# Altium PCB SmokeDetector.PcbDoc
Units mil, origin at the board's own origin, x right, y up, seen from the top; angles counter-clockwise.
Board outline 3000 x 2600 mil, 4 copper layers (M1 Top, M2 GND, M3 PWR, M4 Bottom), stack 58.662 mil thick; 66 components, 55 nets, 274 pads, 52 vias.
Unrouted connection lines stored in the file: 56.
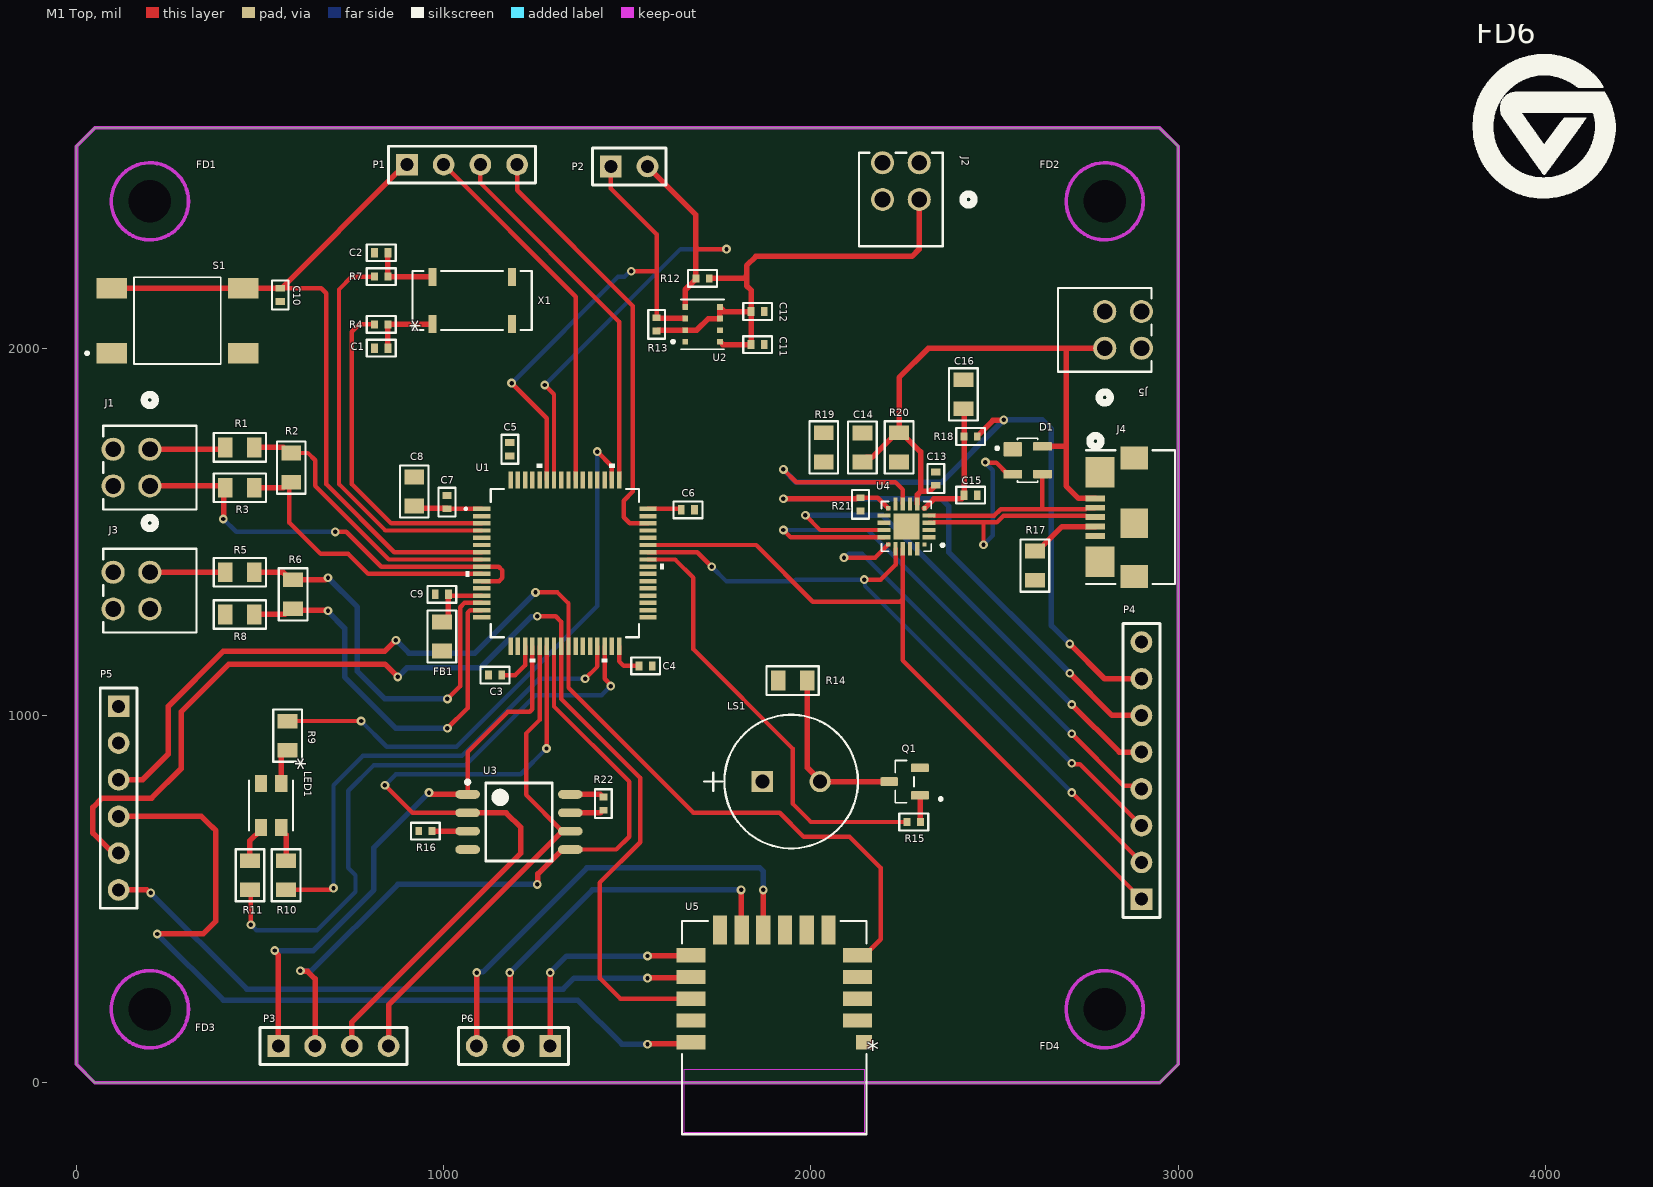
[diagram p0: M1 Top view]
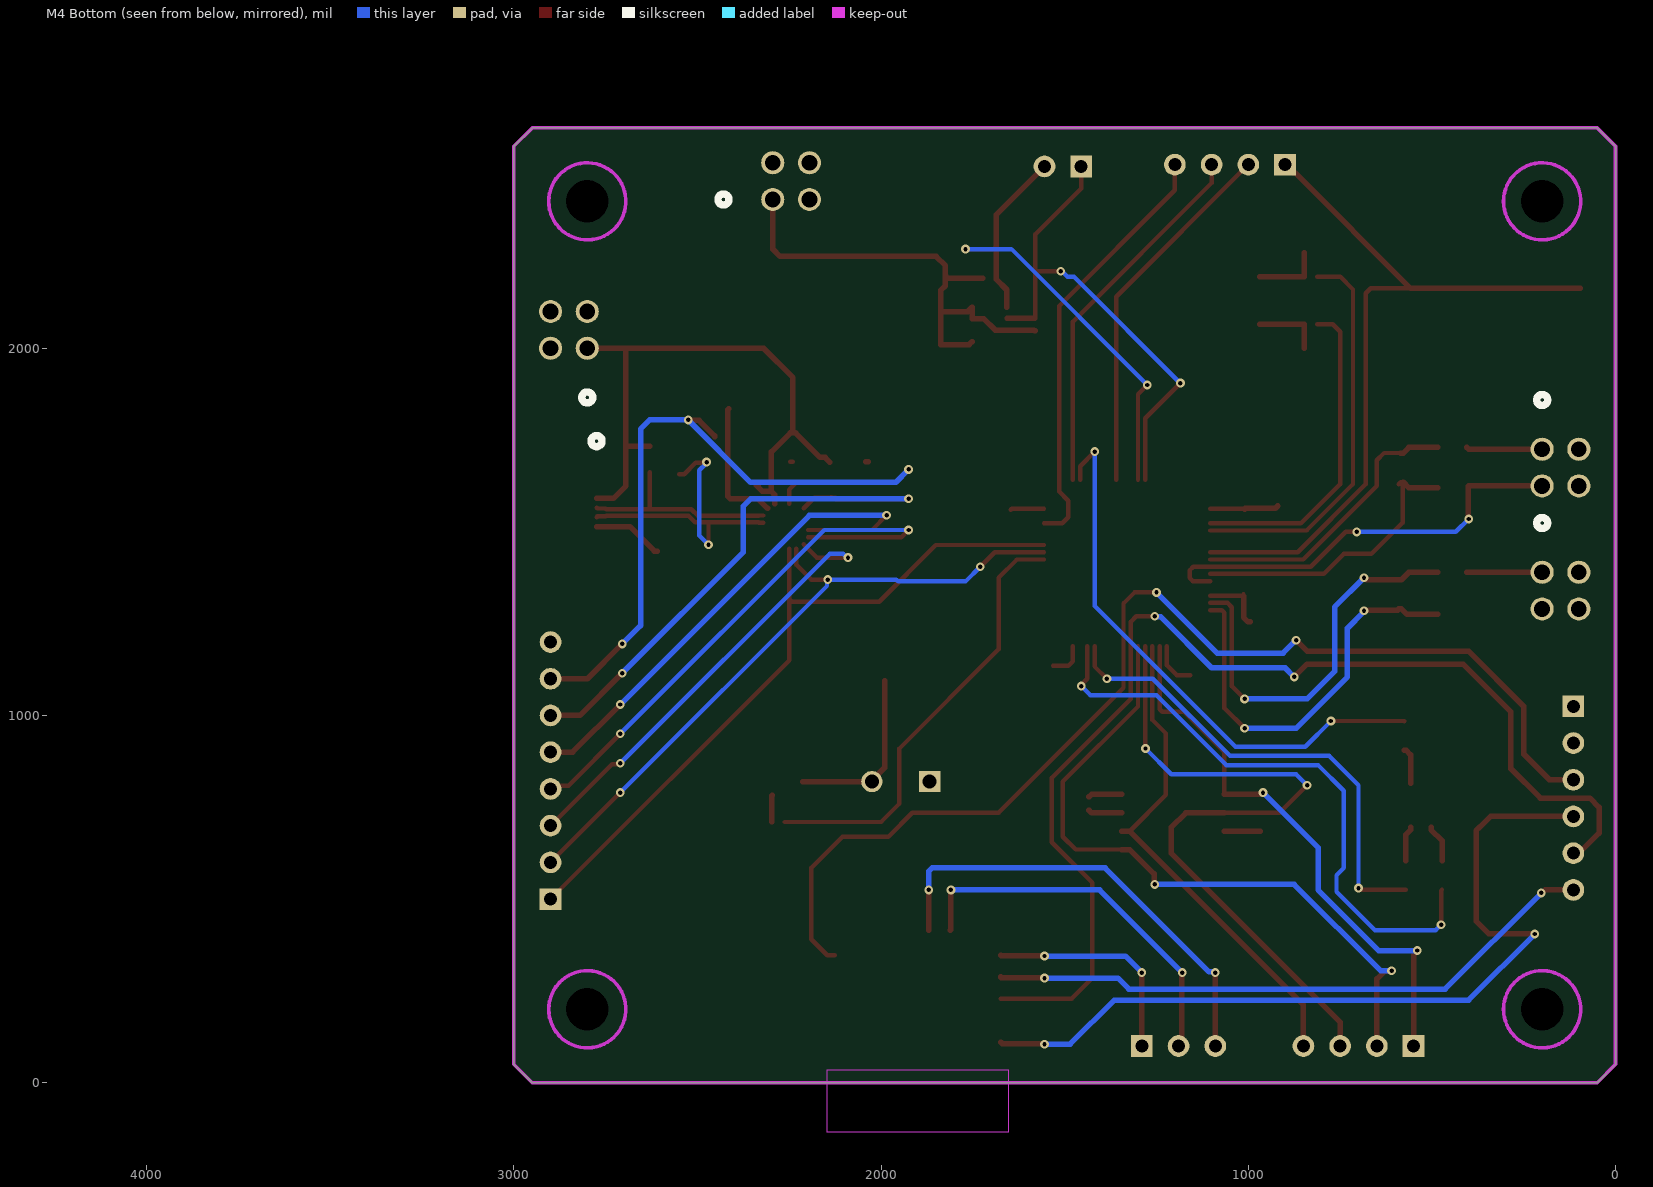
[diagram p1: M4 Bottom view, seen from below]
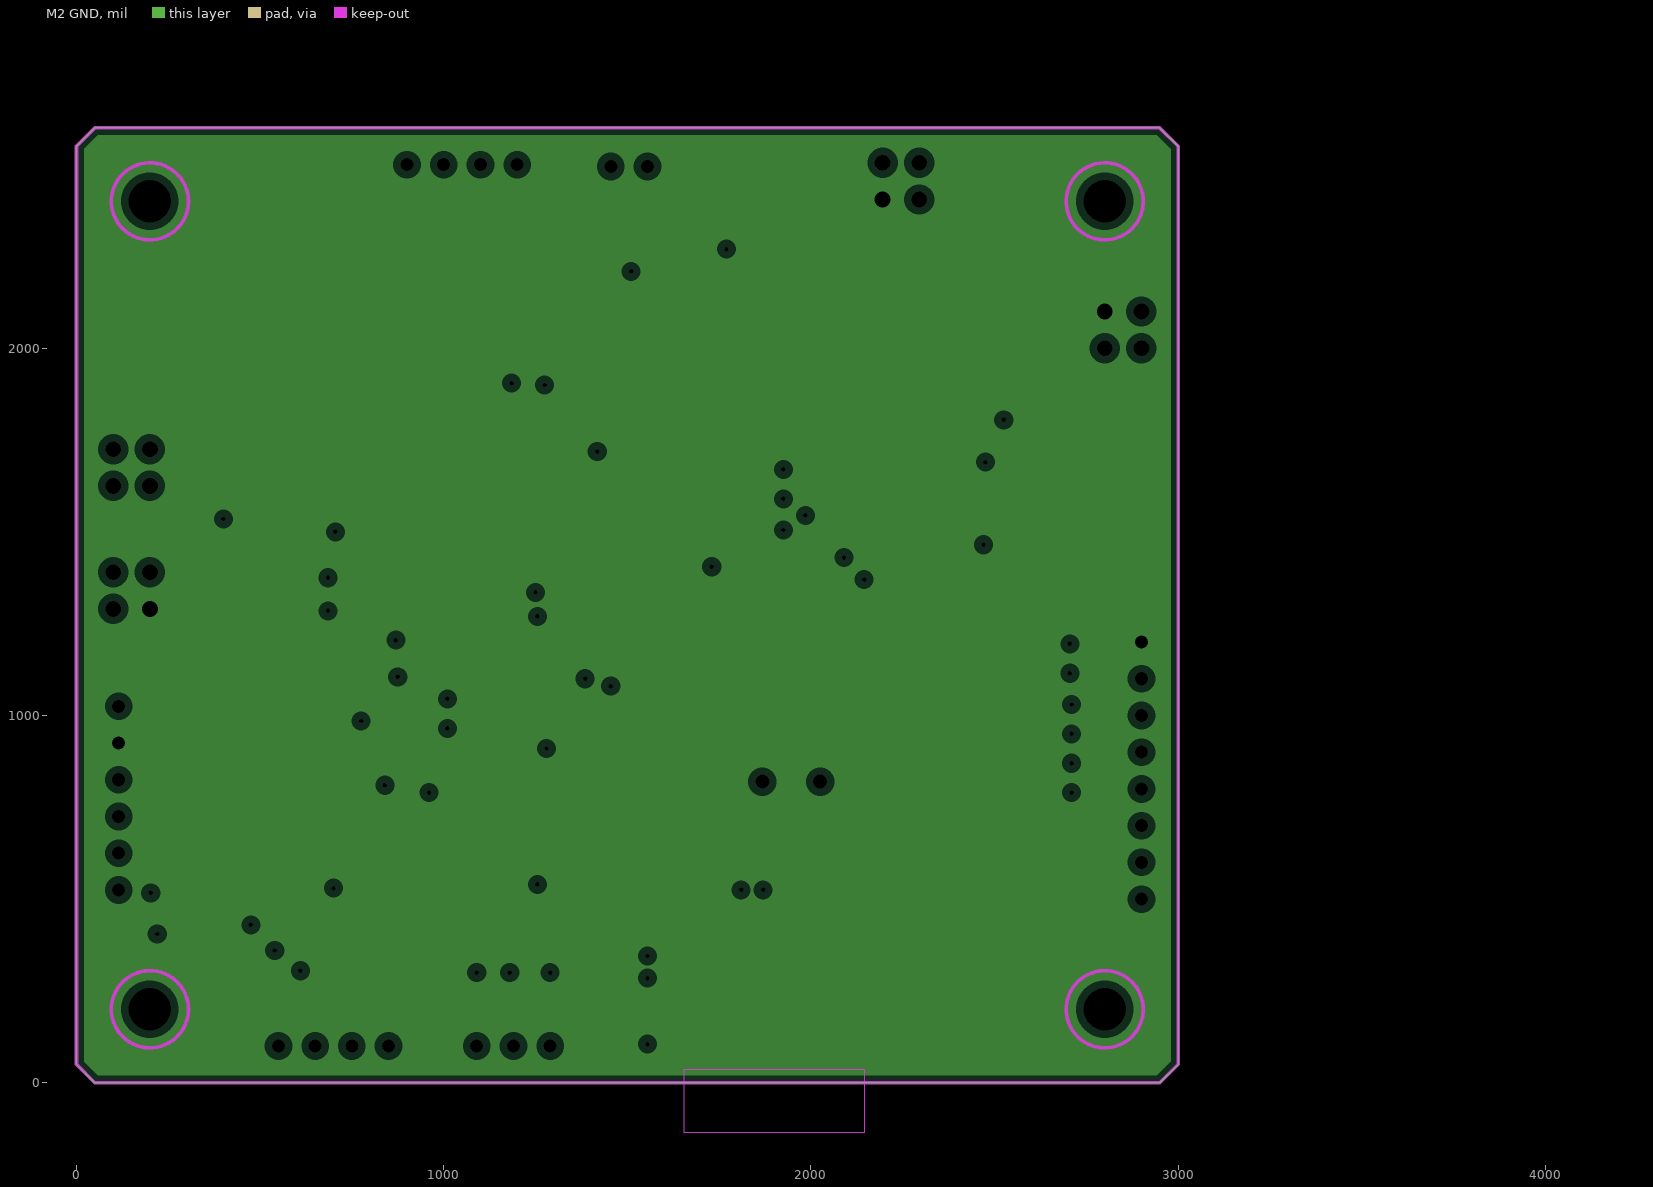
[diagram p2: M2 GND, clearances drawn from the general rule]
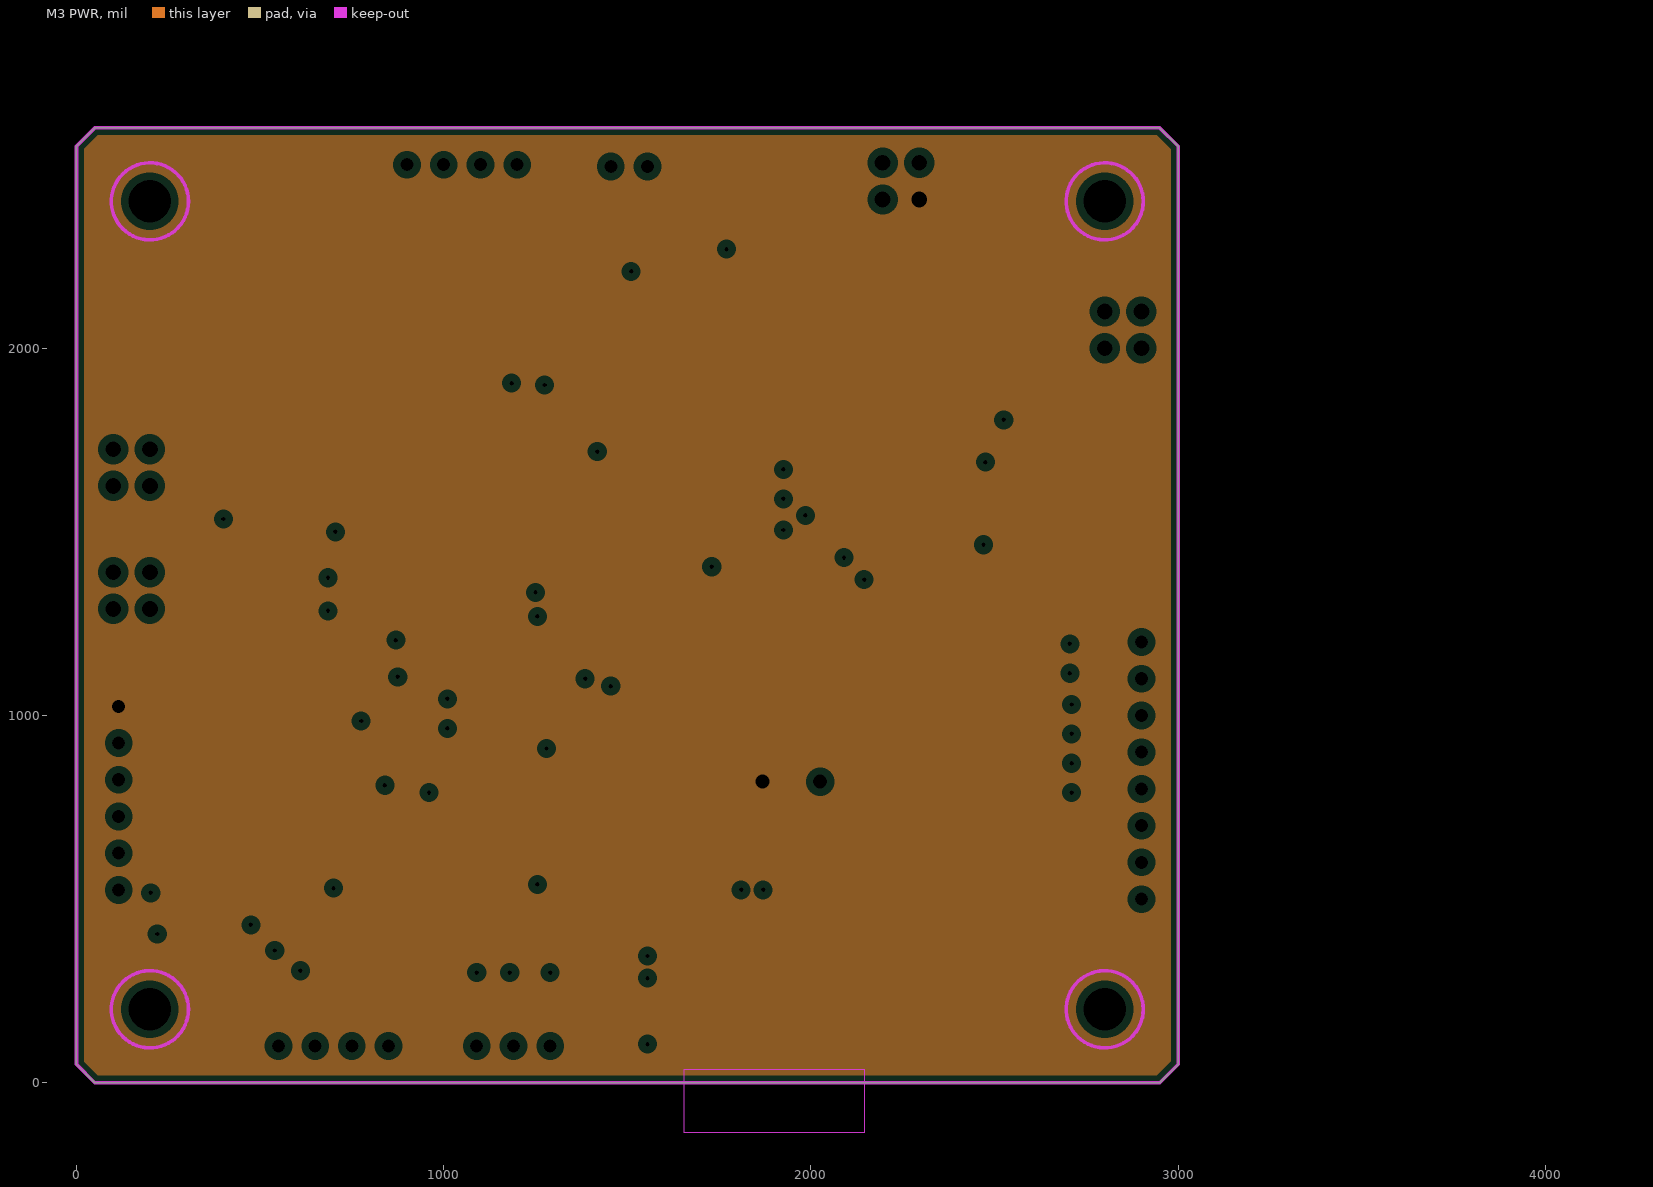
[diagram p3: M3 PWR, clearances drawn from the general rule]
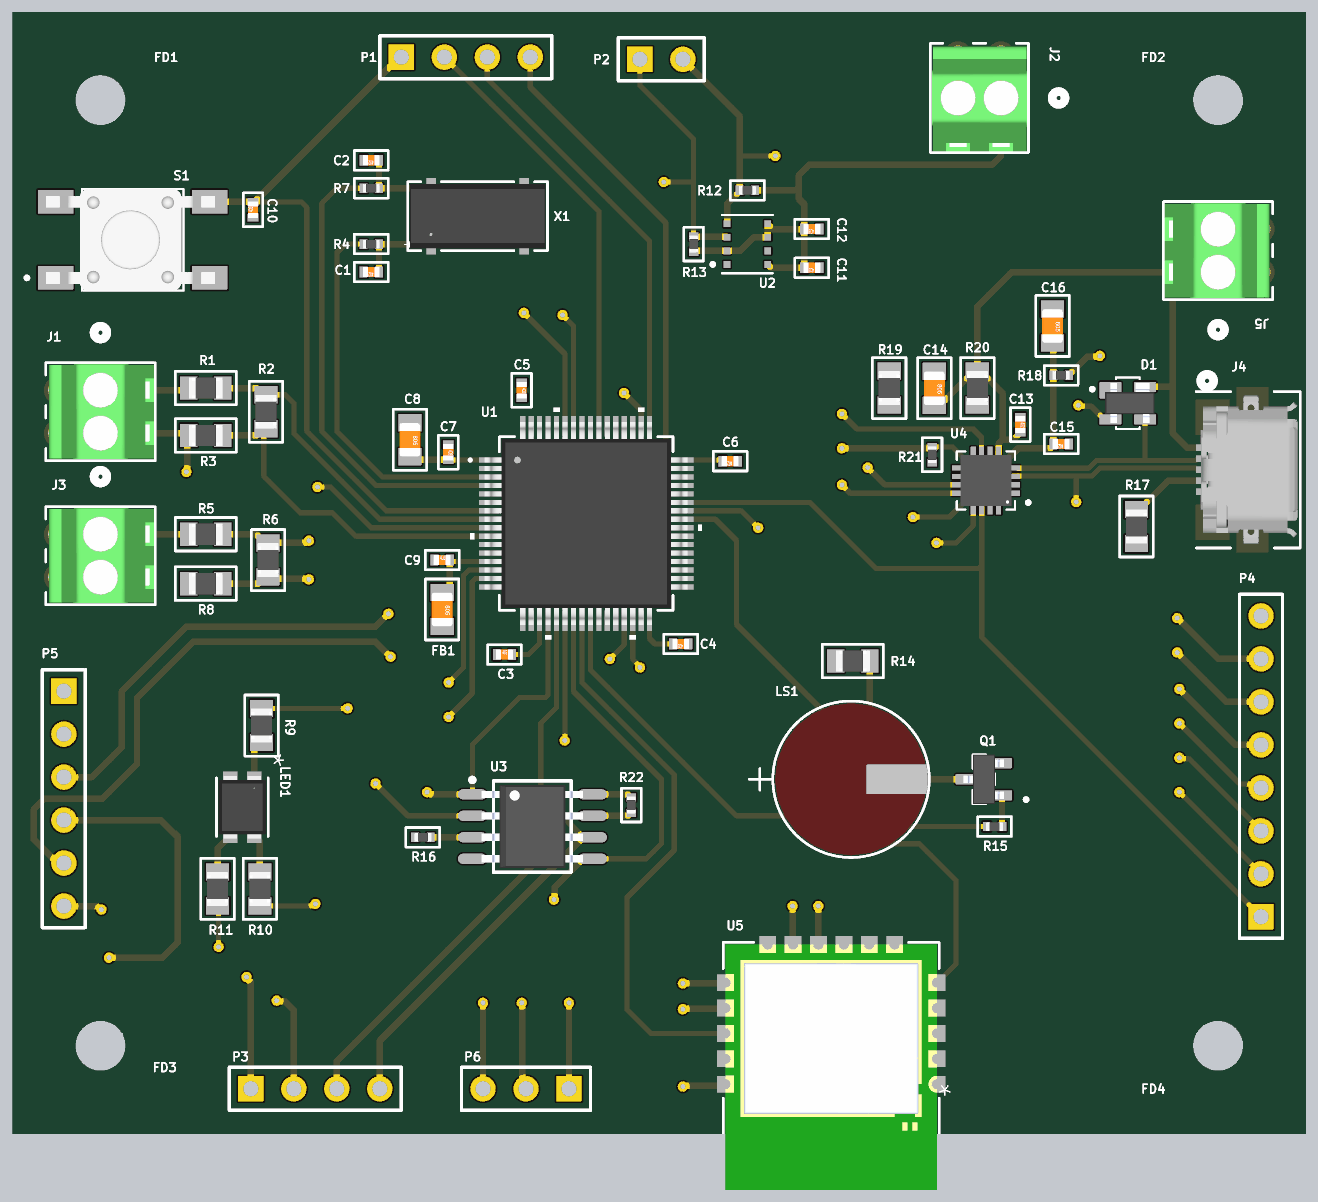
[diagram p4: 3D render of the assembled board from above, using the file's embedded part models]

## Layer stack, top to bottom
Top Solder: solder mask 0.4, Solder Resist, Dk 3.5
M1 Top: signal copper 1.378
Dielectric 1-2: prepreg 4.331, PP-006, Dk 4.29
M2 GND: plane copper 1.378, net GND
Dielectric 2-3: dielectric 44.488, FR-4, Dk 3.96
M3 PWR: plane copper 1.378, net 3V3
Dielectric 3-4: prepreg 4.331, PP-006, Dk 4.29
M4 Bottom: signal copper 1.378
Bottom Solder: solder mask 0.4, Solder Resist, Dk 3.5

## Board outline
0,50 0,2550 50,2600 2950,2600 3000,2550 3000,50 2950,0 50,0

## Design rules (kind name [scope] priority, off if disabled: settings)
BoardOutlineClearance [StringText = FALSE] p1: gap=30 ignorepadtopadclearanceinfootprint=FALSE
Clearance Clearance_Polygon [InPoly = TRUE] p1: gap=12 ignorepadtopadclearanceinfootprint=FALSE
Clearance [All] p2: gap=6 ignorepadtopadclearanceinfootprint=FALSE
DiffPairsRouting [All] p1: maxlimit=10 minlimit=6 mostfreqgap=6 toplayer_minwidth=12 toplayer_maxwidth=15 toplayer_prefwidth=12 bottomlayer_minwidth=12 bottomlayer_maxwidth=15 bottomlayer_prefwidth=12 maxuncoupledlength=500
HoleSize [All] p1: absolutevalues=TRUE maxlimit=5000 minlimit=12 maxpercent=80.000 minpercent=20.000
MinimumSolderMaskSliver [All] p1: minsoldermaskwidth=0
PlaneClearance [All] p1: clearance=20
PlaneConnect [All] p1: pad.planeconnectstyle=Relief pad.reliefexpansion=20 pad.reliefentries=4 pad.reliefconductorwidth=10 pad.reliefairgap=10 via.planeconnectstyle=Direct via.reliefexpansion=20 via.reliefentries=4 via.reliefconductorwidth=10 via.reliefairgap=10
PolygonConnect [All] p1: thpad.connectstyle=Relief thpad.reliefconductorwidth=10 thpad.reliefentries=4 thpad.polygonreliefangle="90 Angle" thpad.airgapwidth=10 smdpad.connectstyle=Relief smdpad.reliefconductorwidth=10 smdpad.reliefentries=4 smdpad.polygonreliefangle="90 Angle" smdpad.airgapwidth=10 via.connectstyle=Direct via.reliefconductorwidth=10 via.reliefentries=4 via.polygonreliefangle="90 Angle" via.airgapwidth=10
RoutingVias [All] p1: holewidth=12 width=26 viastyle="Through Hole" minholewidth=12 minwidth=24 maxholewidth=5000 maxwidth=5000
SilkToSilkClearance [All] p1: silktosilkclearance=0.1
SilkToSolderMaskClearance [IsPad] p1: minsilkscreentomaskgap=0.1 clearancetoexposedcopper=TRUE
SolderMaskExpansion [All] p1: expansion=4 istentingtop=FALSE
Width [All] p1: maxlimit=5000 minlimit=6 preferedwidth=10
23 further rules are at their usual default settings.

## Classes and differential pairs
component class USBtoUART: C13 C14 C15 C16 D1 J4 J5 P4 R17 R18 R19 R20 R21 U4
component class SmokeDetector: C1 C2 C3 C4 C5 C6 C7 C8 C9 C10 FB1 FD1 FD2 FD3 FD4 FD6 J1 J2 J3 LED1 P1 R1 R2 R3 R4 R5 R6 R7 R8 R9 R10 R11 S1 U1 X1
component class GasSensor: C11 C12 LS1 P2 Q1 R12 R13 R14 R15 U2
component class FlashMemory: P3 R16 R22
component class BLE: P5 P6
differential pair D: +D_P -D_N

## Components (designator, comment, footprint, x,y, rotation, side; value= is the part's Value field where it differs from the comment)
C1 "C0402" 0402cap 830,2000 r180 top value=4.3pF
C2 "C0402" 0402cap 830,2260 r180 top value=4.3pF
C3 "C0402" 0402cap 1140,1110 r0 top value=100nF
C4 "C0402" 0402cap 1550,1135 r180 top value=100nF
C5 "C0402" 0402cap 1180,1725 r270 top value=100nF
C6 "C0402" 0402cap 1665,1560 r180 top value=100nF
C7 "C0402" 0402cap 1009.12,1580.88 r270 top value=1uF
C8 "C0805" 0805CAP 920,1610 r270 top value=1uF
C9 "C0402" 0402cap 995,1330 r0 top value=100nF
C10 "C0402" 0402cap 555,2145 r90 top value=100nF
C11 "C0402" 0402cap 1855,2010 r180 top value=100nF
C12 "C0402" 0402cap 1855,2100 r180 top value=100nF
C13 "C0402" 0402cap 2340,1645 r270 top value=0.1uF
C14 "C0805" 0805CAP 2140,1729.6 r270 top value=4.7uF
C15 "C0402" 0402cap 2435,1600 r180 top value=0.1uF
C16 "C0805" 0805CAP 2415,1874.6 r270 top value=4.7uF
D1 "SP0503BAHTG" SOT143 2590,1695 r270 top
FB1 "FB0805" 0805CAP 995,1215 r270 top
FD1 "#4 Mounting Hole" "#4 Mounting Hole-Footprint-1" 200,2400 r0 top
FD2 "#4 Mounting Hole" "#4 Mounting Hole-Footprint-1" 2800,2400 r0 top
FD3 "#4 Mounting Hole" "#4 Mounting Hole-Footprint-1" 200,200 r0 top
FD4 "#4 Mounting Hole" "#4 Mounting Hole-Footprint-1" 2800,200 r0 top
FD6 "GVSU Logo" "GVSU Symbol Only" 4000,2600 r0 top
J1 "1725656" CONN_1725656_PXC 200,1725 r270 top
J2 "1725656" CONN_1725656_PXC 2295,2405 r180 top
J3 "1725656" CONN_1725656_PXC 200,1390 r270 top
J4 "ZX62R-B-5P30" CONN_ZX62R-B-5P30_HIR 2870,1540 r90 top
J5 "1725656" CONN_1725656_PXC 2800,2000 r90 top
LED1 "IN-P32TATRGB" 4-PLCC_3P2X2P8_INL 530,755 r270 top
LS1 "CST-931AP" CST-931AP_CUD 1867.52,820 r0 top
P1 "Header 4" HDR1X4 900,2500 r0 top
P2 "Header 2" HDR1X2 1455,2495 r0 top
P3 "Header 4" HDR1X4 550,100 r0 top
P4 "Header 8" HDR1X8 2900,500 r90 top
P5 "Header 6" HDR1X6 115,1025 r270 top
P6 "Header 3" HDR1X3 1290,100 r180 top
Q1 "2N7002" SOT95P240X111-3N 2255,820 r180 top
R1 "R0805" 0805RES 445,1730 r180 top value=1.0k
R2 "R0805" 0805RES 585,1675 r90 top value=1.0k
R3 "R0805" 0805RES 445,1620 r0 top value=1
R4 "R0402" 0402RES 830,2065 r0 top value=0
R5 "R0805" 0805RES 445,1390 r180 top value=1.0k
R6 "R0805" 0805RES 590,1330 r90 top value=1.0k
R7 "R0402" 0402RES 830,2195 r0 top value=0
R8 "R0805" 0805RES 445,1275 r0 top value=1
R9 "R0805" 0805RES 575,945 r270 top value=150
R10 "R0805" 0805RES 570.86,565 r270 top value=100
R11 "R0805" 0805RES 472.6,565 r270 top value=100
R12 "R0402" 0402RES 1705,2190 r0 top value=4.7k
R13 "R0402" 0402RES 1580,2065 r270 top value=4.7k
R14 "R0805" 0805RES 1950.4,1095 r180 top value=1.0k
R15 "R0402" 0402RES 2280,710 r180 top value=1.0k
R16 "R0402" 0402RES 950,685 r180 top value=10k
R17 "R0805" 0805RES 2609.97,1408.08 r270 top value=0
R18 "R0402" 0402RES 2435,1759.6 r180 top value=1k
R19 "R0805" 0805RES 2035,1730 r90 top value=47.5k
R20 "R0805" 0805RES 2240,1730 r270 top value=22.1k
R21 "R0402" 0402RES 2135,1575 r90 top value=10k
R22 "R0402" 0402RES 1435,760 r90 top value=10k
S1 "TL3301NF160QG" SW_TL3301NF160QG 275,2075 r0 top
U1 "STM32L476RGT6" LQFP64-10x10mm_STM 1330,1415 r0 top
U2 "BME688" IC_BME688 1705,2065 r180 top
U3 "W25X40CLSNIG" SOIC127P790X195-8N 1205,710 r0 top
U4 "CP2102N-A02-GQFN20R" SILABS_CP2102N-A02-GQFN20R 2260,1515 r180 top
U5 "DA14531MOD-00F01002" DA14531MOD_REN 1900,150 r180 top
X1 "ABS25-32.768KHZ-6-T" X_ABS25_ABR 1077.55,2130 r90 top

## Footprints (in the part's own frame and the unit in brackets; to place one, negate y for a bottom-side part, rotate by r counter-clockwise, add the part's x,y. Pads: shape width x height; smd on the part's side, far side on the other; paste and mask are expansions set on the pad)
4-PLCC_3P2X2P8_INL [mil]
  rect 46x33 smd paste+0 mask+0: 1(-60,27.85) 2(-60,-27.85) 3(60,-27.85) 4(60,27.85)
  silkscreen extent -68,-60 68,60, body extent -73,-55 73,55, height 75
0402cap [mm] "Chip Capacitor; Body 1.0 x 0.5 mm (LxW typ)"
  rect 0.47x0.64 smd: 1(-0.458,0) 2(0.458,0)
  silkscreen extent -1,-0.58 1,0.58, body extent -1,-0.58 1,0.58, height 0.2
0402RES [mm] "Chip Resistor; Body 1.0 x 0.5 mm (LxW typ)"
  rect 0.47x0.549 smd: 1(-0.458,0) 2(0.458,0)
  silkscreen extent -1,-0.58 1,0.58, body extent -1,-0.58 1,0.58, height 0.27
0805CAP [mil] "Chip Capacitor; Body 2.0 x 1.2 mm (LxW typ)"
  rect 40x54 smd: 1(-39.6,0) 2(39.6,0)
  silkscreen extent -71,-39 71,39, body extent -71,-39 71,39, height 31
0805RES [mil] "Chip Resistor Body 2.0 x 1.2 mm (LxW typ)"
  rect 40x54 smd: 1(-39.6,0) 2(39.6,0)
  silkscreen extent -71,-39 71,39, body extent -71,-39 71,39, height 19
"#4 Mounting Hole-Footprint-1" [mil]
  round 0 hole 116 unplated: 0(0,0)
  Keep-Out Layer circle w10: c0,0 r105
CONN_1725656_PXC [mil]
  round 63 / inner round 60 / far side round 63 hole 43 paste-99999 mask-31.5: 1(0,0) 2(100,0) 3(0,-100) 4(100,-100)
  silkscreen extent -149,-127 164,127, body extent -60,-120 160,124, height 335
CONN_ZX62R-B-5P30_HIR [mil]
  rect 16x53 smd paste+0 mask+0: 1(51.18,95.33) 2(25.59,95.33) 3(0,95.33) 4(-25.59,95.33) 5(-51.18,95.33)
  rect 63x75 smd paste-37.5 mask-37.5: 6(-161.42,-9.98) 7(161.42,-9.98)
  rect 47x75 smd paste-37.5 mask-37.5: 8(-33.46,-9.98) 9(0,-10)
  rect 83x79 smd paste-41.5 mask-41.5: 10(-122.05,82.54) 11(122.05,82.54)
  silkscreen extent -182,-121 222,121, body extent -173,-115 173,111, height 107
CST-931AP_CUD [mil]
  rect 58x58 / inner round 60 / far side rect 58x58 hole 38 paste-99999 mask+0: 1(0,0)
  round 58 / inner round 60 / far side round 58 hole 38 paste-99999 mask+0: 2(157.48,0)
  silkscreen extent -158,-182 261,182, body extent -98,-177 257,177, height 178
DA14531MOD_REN [mil]
  rect 43x39 smd paste+0 mask+0: J1(-244.4,39.5)
  rect 79x39 smd paste+0 mask+0: J2(-226.4,-19.6) J3(-226.4,-78.7) J4(-226.4,-137.8) J5(-226.4,-196.9) J12(226.4,-196.9) J13(226.4,-137.8) J14(226.4,-78.7) J15(226.4,-19.6) J16(226.4,39.5)
  rect 39x79 smd paste+0 mask+0: J6(-147.75,-265.75) J7(-88.65,-265.75) J8(-29.55,-265.75) J9(29.55,-265.75) J10(88.65,-265.75) J11(147.75,-265.75)
  Keep-Out Layer region: -246,285.5 -246,114.5 246,114.5 246,285.5
  silkscreen extent -251,-291 251,291, body extent -246,-285 246,285, height 120
"GVSU Symbol Only" [mil]
  silkscreen extent -198,-190 191,200
HDR1X2 [mm] "Connector; Header; 2 Position"
  rect 1.5x1.5 hole 0.9: 1(0,0)
  round 1.5 hole 0.9: 2(2.54,0)
  silkscreen extent -1.27,-1.27 3.81,1.27
HDR1X3 [mm] "Connector; Header; 3 Position"
  rect 1.5x1.5 hole 0.9: 1(0,0)
  round 1.5 hole 0.9: 2(2.54,0) 3(5.08,0)
  silkscreen extent -1.27,-1.27 6.35,1.27
HDR1X4 [mm] "Connector; Header; 4 Position"
  rect 1.5x1.5 hole 0.9: 1(0,0)
  round 1.5 hole 0.9: 2(2.54,0) 3(5.08,0) 4(7.62,0)
  silkscreen extent -1.27,-1.27 8.89,1.27
HDR1X6 [mm] "Connector; Header; 6 Position"
  rect 1.5x1.5 hole 0.9: 1(0,0)
  round 1.5 hole 0.9: 2(2.54,0) 3(5.08,0) 4(7.62,0) 5(10.16,0) 6(12.7,0)
  silkscreen extent -1.27,-1.27 13.97,1.27
HDR1X8 [mm] "Connector; Header; 8 Position"
  rect 1.5x1.5 hole 0.9: 1(0,0)
  round 1.5 hole 0.9: 2(2.54,0) 3(5.08,0) 4(7.62,0) 5(10.16,0) 6(12.7,0) 7(15.24,0) 8(17.78,0)
  silkscreen extent -1.27,-1.27 19.05,1.27
IC_BME688 [mm]
  rect 0.4x0.4 smd: 1(1.2,1.2) 2(1.2,0.4) 3(1.2,-0.4) 4(1.2,-1.2) 5(-1.2,-1.2) 6(-1.2,-0.4) 7(-1.2,0.4) 8(-1.2,1.2)
  silkscreen extent -1.5,-1.72 2.14,1.72, body extent -1.5,-1.5 1.5,1.5, height 1
LQFP64-10x10mm_STM [mil]
  rect 47x12 smd paste+0 mask+0: 1(-226.38,147.64) 2(-226.38,127.95) 3(-226.38,108.27) 4(-226.38,88.58) 5(-226.38,68.9) 6(-226.38,49.21) 7(-226.38,29.53) 8(-226.38,9.84) 9(-226.38,-9.84) 10(-226.38,-29.53) 11(-226.38,-49.21) 12(-226.38,-68.9) 13(-226.38,-88.58) 14(-226.38,-108.27) 15(-226.38,-127.95) 16(-226.38,-147.64) 33(226.38,-147.64) 34(226.38,-127.95) 35(226.38,-108.27) 36(226.38,-88.58) 37(226.38,-68.9) 38(226.38,-49.21) 39(226.38,-29.53) 40(226.38,-9.84) 41(226.38,9.84) 42(226.38,29.53) 43(226.38,49.21) 44(226.38,68.9) 45(226.38,88.58) 46(226.38,108.27) 47(226.38,127.95) 48(226.38,147.64)
  rect 12x47 smd paste+0 mask+0: 17(-147.64,-226.38) 18(-127.95,-226.38) 19(-108.27,-226.38) 20(-88.58,-226.38) 21(-68.9,-226.38) 22(-49.21,-226.38) 23(-29.53,-226.38) 24(-9.84,-226.38) 25(9.84,-226.38) 26(29.53,-226.38) 27(49.21,-226.38) 28(68.9,-226.38) 29(88.58,-226.38) 30(108.27,-226.38) 31(127.95,-226.38) 32(147.64,-226.38) 49(147.64,226.38) 50(127.95,226.38) 51(108.27,226.38) 52(88.58,226.38) 53(68.9,226.38) 54(49.21,226.38) 55(29.53,226.38) 56(9.84,226.38) 57(-9.84,226.38) 58(-29.53,226.38) 59(-49.21,226.38) 60(-68.9,226.38) 61(-88.58,226.38) 62(-108.27,226.38) 63(-127.95,226.38) 64(-147.64,226.38)
  silkscreen extent -273,-270 270,270, body extent -236,-236 236,236, height 63
SILABS_CP2102N-A02-GQFN20R [mm]
  rect 0.3x0.3 smd: 1(-1.25,1.25) 6(-1.25,-1.25) 11(1.25,-1.25) 16(1.25,1.25)
  rect 0.9x0.3 smd: 2(-1.55,0.75) 3(-1.55,0.25) 4(-1.55,-0.25) 5(-1.55,-0.75) 12(1.55,-0.75) 13(1.55,-0.25) 14(1.55,0.25) 15(1.55,0.75)
  rect 0.3x0.9 smd: 7(-0.75,-1.55) 8(-0.25,-1.55) 9(0.25,-1.55) 10(0.75,-1.55) 17(0.75,1.55) 18(0.25,1.55) 19(-0.25,1.55) 20(-0.75,1.55)
  rect 1.8x1.8 smd paste-2: 21(0,0)
  silkscreen extent -2.6,-1.72 1.72,1.72, body extent -1.5,-1.5 1.5,1.5, height 0.8
SOIC127P790X195-8N [mm] "SOIC, 8-Leads, Body 5.28x5.28mm, Pitch 1.27mm, IPC Medium Density"
  oval 1.7x0.6 smd: 1(-3.55,1.905) 2(-3.55,0.635) 3(-3.55,-0.635) 4(-3.55,-1.905) 5(3.55,-1.905) 6(3.55,-0.635) 7(3.55,0.635) 8(3.55,1.905)
  silkscreen extent -3.67,-2.7 2.3,2.88, body extent -3,-2.45 3,2.45, height 1.75
SOT95P240X111-3N [mm]
  rrect25% 1.23x0.6 smd: 1(-1.06,0.95) 2(-1.06,-0.95) 3(1.06,0)
  silkscreen extent -2.6,-1.46 0.65,1.46, body extent -1.2,-1.45 1.2,1.45, height 1.11
SOT143 [mm]
  rrect15% 0.99x1.3 smd: 1(-0.76,-1.025)
  rrect15% 0.59x1.3 smd: 2(0.96,-1.025) 3(0.96,1.025) 4(-0.96,1.025)
  silkscreen extent -1.52,-2.2 1.52,0.7, body extent -1.18,-1.33 1.18,1.59, height 1.22
SW_TL3301NF160QG [mm]
  rect 2.1x1.4 smd: 1(-4.55,-2.25) 2(4.55,-2.25) 3(-4.55,2.25) 4(4.55,2.25)
  silkscreen extent -6.35,-3 3,3, body extent -5.13,-3 4.87,3, height 4.38
X_ABS25_ABR [mil]
  rect 49x22 smd paste+0 mask+0: 1(-64.5,108.27) 2(-64.5,-108.27) 3(64.5,-108.27) 4(64.5,108.27)
  silkscreen extent -80,-162 80,162, body extent -75,-157 75,157, height 98

## Part data
C1 C2 C3 C4 C5 C6 C7 C9 C10 C11 C12 C13 C15: "0402 Ceramic Chip Capacitor - Standard"
C8 C14 C16: "0805 Ceramic Chip Capacitor - Standard"
D1: "TVS DIODE 5.5VWM 8.5VC SOT143 <a href=\"https://pricing.snapeda.com/parts/SP0503BAHTG/Littelfuse/view-part?ref=eda\">Check availability</a>", Package=None, Availability=Unavailable, MF="{'manufacturer': u'Littelfuse Inc.'}", MP=SP0503BAHTG, Price=None
FB1: "0805 Multilayer Ferrite Power Bead", Manufacturer="KOA Speer", Manufacturer P/N=CAP2AFTTD221P, Resistance @ 100MHz=220, Price=0.15, Vendor=Mouser, Vendor P/N=660-CZP2AFTTD221P
FD1 FD2 FD3 FD4: "#4 clearance hole, unplated."
FD6: "GVSU Logo (Several Symbols)"
J1 J2 J3 J5: "No Description Available", Mfr_Name="Phoenix Contact", RefDes=RefDes, Type=Type
J4: "No Description Available", Mfr_Name=Hirose, RefDes=RefDes, Type=Type
LED1: "No Description Available", Mfr_Name=Inolux, RefDes=RefDes, Type=Type
LS1: "No Description Available", Mfr_Name="CUI Devices", RefDes=RefDes, Type=Type
P1 P3: "Header, 4-Pin", LatestRevisionDate=17-Jul-2002, LatestRevisionNote="Re-released for DXP Platform.", Publisher="Altium Limited"
P2: "Header, 2-Pin", LatestRevisionDate=17-Jul-2002, LatestRevisionNote="Re-released for DXP Platform.", Publisher="Altium Limited"
P4: "Header, 8-Pin", LatestRevisionDate=17-Jul-2002, LatestRevisionNote="Re-released for DXP Platform.", Publisher="Altium Limited"
P5: "Header, 6-Pin", LatestRevisionDate=17-Jul-2002, LatestRevisionNote="Re-released for DXP Platform.", Publisher="Altium Limited"
P6: "Header, 3-Pin", LatestRevisionDate=17-Jul-2002, LatestRevisionNote="Re-released for DXP Platform.", Publisher="Altium Limited"
Q1: "N-Channel 60V 280mA (Ta) 350mW (Ta) Surface Mount SOT-23-3 (TO-236)", Package=None, Availability=Unavailable, MP=altium_native_batch, Price=None
R1 R2 R3 R5 R6 R8 R9 R10 R11 R14 R17 R19 R20: "0805 Chip Resistor - Standard"
R4 R7 R12 R13 R15 R16 R18 R21 R22: "0402 Chip Resistor - Standard"
S1: "<a href=\"https://pricing.snapeda.com/parts/TL3301NF160QG/E-Switch/view-part?ref=eda\">Check availability</a> <a href=\"https://pricing.snapeda.com/parts/TL3301NF160QG/E-Switch/view-part?ref=eda\">Check availability</a>", Package=None, Availability=Unavailable, MF="{'manufacturer': u'E-Switch'}", MP=TL3301NF160QG, Price=None
U1: "No Description Available", Manufacturer=STMicroelectronics, Manufacturer P/N=STM32L476RGT6, Mfr_Name=STMicroelectronics, Price=$8.46150, RefDes=RefDes, Type=Type, Vendor="Digi Key Corp.", Vendor P/N=497-15877-ND
U2: "Gas sensor measuring relative humidity, barometric pressure, ambient temperature and gas (VOC)", Package=None, Availability=Unavailable, MP=BME688, Price=None
U3: "FLASH Memory IC 4Mbit SPI 104 MHz 8-SOIC", Manufacturer="Winbond Electronics", Manufacturer P/N=W25X40CLSNIG, Price=$0.32890, Vendor="Digi Key Corp.", Vendor P/N=W25X40CLSNIG-ND
U4: "USB Bridge, USB to UART USB 2.0 UART Interface 20-QFN (3x3)", Package=None, Check_prices=https://www.snapeda.com/parts/CP2102N-A02-GQFN20R/Silicon+Labs/view-part/?ref=eda, MF="Silicon Labs", MP=CP2102N-A02-GQFN20R, SnapEDA_Link=https://www.snapeda.com/parts/CP2102N-A02-GQFN20R/Silicon+Labs/view-part/?ref=snap
U5: "No Description Available", Mfr_Name="Renesas Electronics", RefDes=RefDes, Type=Type
X1: "No Description Available", Mfr_Name=Abracon, RefDes=RefDes, Type=Crystals

## Via types
v1: diameter 24, hole 12, M1 Top to M4 Bottom, 52 vias

## Nets (pads, with @x,y where several pads share a name; then routed paths per layer and width w, separated by ;. In a path a pad name is that pad's centre, name@x,y a point inside that pad or via, vN(x,y) a via of type N, cw(c..) or ccw(c..) an arc to the next point about the centre after c; other vN are vias at no path point)
3V3: C3.2 C4.2 C5.2 C6.2 C7.2 C8.2 C11.2 C12.2 FB1.2 J2.1 LED1.2 LS1.1 P5.1 R12.2 R13.2 R14.2 R16.2 R22.2 U1.1 U1.19 U1.32 U1.48 U1.64 U2.2 U2.5 U2.6 U2.8 U3.8 U5.J7 | length 1944
  M1 Top w12: C7.2@1009.31,1562.64 U1.1 ; C3.2 1195,1110 1221.73,1136.73 U1.19 ; U1.32 1477.64,1147.36 1490,1135 C4.2 ; U1.48 1644.31,1562.64 C6.2
  M1 Top w15: C8.2 926.7,1563.7 1008.25,1563.7 C7.2 1009.31,1562.64 C7.2@1010,1561.95 ; U3.8 1426.49,785 1433.44,778.05 R22.2 ; R13.2 1581.56,2046.95 1583.86,2049.25 U2.2 1689.07,2049.25 1720.56,2080.75 U2.6 U2.5 1764.49,2100 C12.2 ; R12.2 1817.43,2190 1825,2197.57 ; U2.8 1760,2010 C11.2 C12.2 ; J2.1 2295,2270 2275,2250 1850,2250 1825,2225 1825,2197.57 ; 1825,2197.57 1825,2170.15 1836.95,2158.2 C12.2
BAT_I_SENSE: R6.1 R8.2 U1.15 | length 1125
  M1 Top w12: v1(1010,965) 1010.06,965 1065.03,1019.97 ; 1065,1020 1065,1280 1072.05,1287.05 U1.15
  M1 Top w15: R8.2 567.6,1275 583,1290.4 R6.1 593.68,1286.72 683.28,1286.72 v1(685,1285)
  M4 Bottom w15: v1(685,1285) 685,1282.56 730,1237.56 730,1105 870,965 v1(1010,965)
BAT_V_SENSE: R5.1 R6.2 U1.14 | length 1103.3
  M1 Top w12: v1(1010,1045) 1045,1080 1045,1295 1056.73,1306.73 U1.14
  M1 Top w15: R5.1 562.6,1390 583,1369.6 R6.2 590.2,1369.8 677.36,1369.8 682.56,1375 v1(685,1375)
  M4 Bottom w15: v1(685,1375) 765,1295 765,1120 840,1045 v1(1010,1045)
BLUE: R11.2 U1.30 | length 1663
  M1 Top w12: R11.2 475,523 v1(475,430) ; U1.30 1438.27,1099.98 1455,1083.25 v1(1455,1080)
  M4 Bottom w12: v1(475,430) 490,415 655,415 760,520 760,565 740,585 740,795 810,865 1060,865 1250,1055 1430,1055 v1(1455,1080)
BT_RST: P6.1 U5.J12 | length 603
  M1 Top w15: P6.1 v1(1290,300) ; v1(1555,345) 1555.95,345.95 1672.65,345.95 U5.J12
  M4 Bottom w15: v1(1290,300) 1335,345 v1(1555,345)
BT_Rx: P5.5 U1.24 U5.J14 | length 3140.7
  M1 Top w12: v1(1255,1270) 1305,1270 1320.16,1254.84 1320.16,1044.84 1535,830 1535,655 1425,545 1425,285 1481.3,228.7 U5.J14
  M1 Top w15: P5.5@100,625 45,680 45,750 70,775 205,775 285,855 285,1010 415,1140 840,1140 v1(875,1105)
  M4 Bottom w15: v1(875,1105) 900,1130 1100,1130 1238.28,1268.28 1253.28,1268.28 v1(1255,1270)
BT_Tx: P5.3 U1.25 U5.J5 | length 3112.9
  M1 Top w12: v1(1250,1335) 1310,1335 1339.84,1305.16 U1.25 1339.84,1075.16 1680,735 1915,735 1980,670 2105,670 2190,585 2190,390.5 2146.4,346.9 U5.J5
  M1 Top w15: P5.3 180,825 250,895 250,1025 400,1175 840,1175 v1(870,1205)
  M4 Bottom w15: v1(870,1205) 905,1170 1085,1170 v1(1250,1335)
BUZZER: R15.2 U1.41 | length 1203.8
  M1 Top w12: U1.41 1630.16,1424.84 1680,1375 1680,1180 1950,910 1950,760 2000,710 R15.2
CTS: P4.4 U4.15 | length 1549.1
  M1 Top w12: v1(1925,1505) 1944.53,1485.47 U4.15 ; v1(2710,950) 2851,809 2891,809 P4.4
  M4 Bottom w12: v1(1925,1505) 2155,1505 v1(2710,950)
D_N: D1.3 J4.2 U4.5 | length 563.4
  M1 Top w12: U4.5 2332.65,1544.53 2333.49,1543.69 2470,1543.69 2498.69,1543.69 2516.8,1561.8 2630.77,1561.8 ; D1.3@2630,1661.8 2630,1562.56 2630.77,1561.8 ; J4.2 2772.67,1563.59 2750.17,1563.59 2748.37,1561.8 2630.77,1561.8
D_P: D1.2 J4.3 U4.4 | length 855.6
  M1 Top w12: U4.4 2332.65,1524.84 2333.49,1525.69 2470,1525.69 ; v1(2470,1465) 2470,1525.69 ; v1(2475,1690) 2477.13,1687.87 2505,1687.87 2535.67,1657.2 D1.2 ; J4.3 2772.67,1542 2750.17,1542 2748.37,1543.8 2524.25,1543.8 2506.14,1525.69 2470,1525.69
  M4 Bottom w12: v1(2470,1465) 2495,1490 2495,1667.57 2475,1687.57 v1(2475,1690)
GND: C1.2 C2.2 C3.1 C4.1 C5.1 C6.1 C7.1 C8.1 C9.1 C10.1 C11.1 C12.1 C13.1 C14.1 C15.1 C16.1 D1.1 J2.2 J3.2 J4.5 J5.2 P4.8 P5.2 Q1.2 R8.1 R17.2 R19.2 R21.1 S1.1 S1.2 U1.12 U1.18 U1.31 U1.47 U1.63 U2.1 U2.7 U3.4 U4.3 U4.12 U4.21 U5.J1 U5.J2 U5.J3 U5.J4 U5.J6 U5.J11
GREEN: R10.2 U1.29 | length 1318.7
  M1 Top w12: R10.2 692.15,525.4 696.75,530 v1(700,530) ; v1(1385,1100) 1418.58,1133.58 U1.29
  M4 Bottom w12: v1(700,530) 700,810 780,890 1050,890 1260,1100 v1(1385,1100)
NetC1_1: C1.1 R4.2 X1.1 | length 186.4
  M1 Top w15: C1.1 R4.2 968.78,2065 X1.1
NetC2_1: C2.1 R7.2 X1.4 | length 186.4
  M1 Top w15: C2.1 R7.2 968.78,2195 X1.4
NetJ4_4: J4.4 R17.1 | length 192.3
  M1 Top w15: R17.1 2616.97,1447.68 2683.7,1514.41 J4.4
NetLED1_1: LED1.1 R9.2 | length 100.2
  M1 Top w15: LED1.1 557.85,892.9 570.35,905.4 R9.2
NetLED1_3: LED1.3 R11.1 | length 102.6
  M1 Top w15: R11.1 472.6,658.96 502.15,688.5 LED1.3
NetLED1_4: LED1.4 R10.1 | length 95.8
  M1 Top w15: LED1.4 557.85,688.5 570.86,675.5 R10.1
NetLS1_2: LS1.2 Q1.3 R14.1 | length 477.8
  M1 Top w15: R14.1 1990,857.83 2025,822.83 LS1.2 Q1.3
NetQ1_1: Q1.1 R15.1 | length 73.1
  M1 Top w15: Q1.1 2297.39,781.94 2297.39,710.66 R15.1
NetR4_1: R4.1 U1.3 | length 883.1
  M1 Top w12: R4.1 770,2065 750,2045 750,1630 856.73,1523.27 U1.3
NetR7_1: R7.1 U1.4 | length 1082.4
  M1 Top w12: R7.1 750,2195 715,2160 715,1630 841.42,1503.58 U1.4
NetR16_1: R16.1 U3.3 | length 97.2
  M1 Top w15: R16.1 U3.3
NetR19_1: R19.1 R20.2 U4.8 | length 14
  M1 Top w12: R20.2 R20.2@2247,1690.4
  M1 Top w15: R19.1 R19.1@2042,1690.4
NetR22_1: R22.1 U3.7 | length 93.1
  M1 Top w15: U3.7 1426.49,735 1433.44,741.95 R22.1
NRST: C10.2 P1.1 S1.3 S1.4 U1.7 | length 2091.4
  M1 Top w12: C10.2 558.35,2163.05 666.95,2163.05 680,2150 680,1630 865.47,1444.53 U1.7
  M1 Top w15: S1.3 S1.4 454.67,2163.05 C10.2 ; C10.2@558.35,2163.05 873.27,2477.97 877.97,2477.97 P1.1
nSUSPEND: P4.6 R21.2 U4.11 | length 1591.6
  M1 Top w12: R21.2 2181.95,1593.05 U4.11
  M1 Top w15: v1(1925,1590) 2122.91,1590 2124.2,1591.3 2133.25,1591.3 R21.2 ; v1(2705,1115) 2820,1000 P4.6
  M4 Bottom w15: v1(1925,1590) 2355,1590 2375,1570 2375,1445 v1(2705,1115)
RED: R9.1 U1.50 | length 1545.2
  M1 Top w12: R9.1 575.4,985 v1(775,985) ; v1(1418.19,1718.59) 1457.95,1678.83 U1.50
  M4 Bottom w12: v1(775,985) 845,915 1035,915 1418.19,1298.19 v1(1418.19,1718.59)
RST: P4.7 R18.1 U4.9 | length 2143.7
  M1 Top w12: v1(1925,1670) 1960,1635 2230,1635 2249.88,1615.12 U4.9@2249.88,1576.02
  M1 Top w15: R18.1 2453.05,1761.16 2495.17,1803.28 2523.28,1803.28 v1(2525,1805) ; v1(2705,1195) 2800,1100 P4.7
  M4 Bottom w15: v1(1925,1670) 1960,1635 2355,1635 v1(2525,1805) 2630,1805 2655,1780 2655,1245 v1(2705,1195)
RTS: P4.3 U4.16 | length 1256.3
  M1 Top w12: v1(2090,1430) 2175,1430 U4.16 ; v1(2710,870) 2712.3,867.7 2732.3,867.7 P4.3
  M4 Bottom w12: v1(2090,1430) 2093.03,1430 2103.03,1440 2140,1440 v1(2710,870)
SCL: P2.2 R12.1 U1.58 U2.4 | length 1452.7
  M1 Top w12: v1(1275,1900) 1300.47,1874.53 U1.58 ; R12.1@1686.95,2188.44 R12.1 ; 1686.95,2276.53 1693.47,2270 v1(1770,2270)
  M1 Top w15: P2.2 1686.95,2363.05 1686.95,2276.53 R12.1 ; U2.4 1657.76,2159.25 R12.1@1686.95,2188.44
  M4 Bottom w12: v1(1275,1900) 1645,2270 v1(1770,2270)
SDA: P2.1 R13.1 U1.59 U2.3 | length 1366.9
  M1 Top w12: v1(1185,1905) 1280.79,1809.21 U1.59 ; P2.1 1455,2435 1580,2310 1580,2209.47 ; v1(1510.53,2209.47) 1580,2209.47 ; R13.1@1581.15,2081.9 R13.1 1580,2209.47 ; U2.3@1656.6,2081.9 U2.3
  M1 Top w15: R13.1@1581.15,2081.9 U2.3@1656.6,2081.9
  M4 Bottom w12: v1(1185,1905) 1474.54,2194.54 1492.36,2194.54 1507.28,2209.47 v1(1510.53,2209.47)
SOL_I_SENSE: R2.1 R3.2 U1.10 | length 801.6
  M1 Top w12: R2.1@590.57,1629.83 R2.1 580,1630.4 580,1524.94 664.97,1439.97 ; 665,1440 740,1440 794.53,1385.47 U1.10
  M1 Top w15: R3.2 562.6,1620 R2.1@578,1635.4
SOL_V_SENSE: R1.1 R2.2 U1.8 | length 786.4
  M1 Top w12: R2.2 630.4,1714.6 650,1695 650,1625 850.16,1424.84 U1.8
  M1 Top w15: R1.1 562.6,1730 578,1714.6 R2.2
"SP BAT": J3.1 R5.2 | length 205.4
  M1 Top w15: J3.1 R5.2
SP+: J1.1 R1.2 | length 207.5
  M1 Top w15: J1.1 400.4,1725 R1.2
SP-: J1.2 R3.1 U1.9 U1.11 | length 1189.9
  M1 Top w12: v1(705,1500) 735,1500 829.84,1405.16 U1.9 1149.84,1405.16 1160.03,1394.97 1160.03,1385.03 ; U1.11 1150.79,1365.79 1160,1375 1160,1385
  M1 Top w15: J1.2 400.4,1625 401.72,1623.68 401.72,1536.72 v1(400,1535)
  M4 Bottom w12: v1(400,1535) 435,1500 v1(705,1500)
SPI_CLK: P3.4 U1.21 U3.6 | length 1362.4
  M1 Top w12: U1.21 1261.1,987.73 1224.29,950.92 1224.29,783.82 U3.6@1323.11,685
  M1 Top w15: P3.4 850,211.89 1323.11,685 U3.6
SPI_CS: P3.1 U1.20 U3.1 | length 1548.3
  M1 Top w12: U3.1 1065.24,900.24 1175,1010 1234.39,1010 1241.42,1017.03 U1.20
  M1 Top w15: v1(540,360) 540,357.56 550,347.56 P3.1 ; v1(960,790) 962.44,790 967.44,785 U3.1
  M4 Bottom w15: v1(540,360) 645,360 810,525 810,640 v1(960,790)
SPI_MISO: P3.3 U1.22 U3.2 | length 1962.4
  M1 Top w12: v1(840,810) 915,735 U3.2 ; v1@1280.79,910.79 U1.22
  M1 Top w15: P3.3 750,165 1210,625 1210,695 1170,735 U3.2
  M4 Bottom w12: v1(840,810) 870,840 1210,840 v1(1280,910)
SPI_MOSI: P3.2 U1.23 U3.5 | length 1897.1
  M1 Top w12: U1.23 1300.47,1024.53 1505,820 1505,670 1470,635 U3.5
  M1 Top w15: v1(610,305) 611.72,303.28 629.29,303.28 650,282.56 P3.2 ; v1(1255,540) 1256.72,541.72 1256.72,568.61 1323.11,635 U3.5
  M4 Bottom w15: v1(610,305) 640,305 875,540 v1(1255,540)
SUSPEND: P4.5 U4.14 | length 1412.6
  M1 Top w12: v1(1985,1545) 2024.84,1505.16 U4.14
  M1 Top w15: v1(2710,1030) 2840,900 P4.5
  M4 Bottom w15: v1(1985,1545) 2195,1545 v1(2710,1030)
SWCLK: P6.2 U5.J10 | length 1037.2
  M1 Top w15: v1(1180,300) 1181.72,298.28 1181.72,108.28 P6.2 ; v1(1810,525) 1810.68,524.33 1810.68,416.42 U5.J10
  M4 Bottom w15: v1(1180,300) 1405,525 v1(1810,525)
SWDIO: P6.3 U5.J9 | length 1262.3
  M1 Top w15: P6.3 v1(1090,300) ; v1(1870,525) 1870.22,524.78 1870.22,415.97 U5.J9
  M4 Bottom w15: v1(1090,300) 1091.72,301.72 1106.72,301.72 1390,585 1861.21,585 1870,576.21 v1(1870,525)
SWO: P1.2 U1.55 | length 1007.5
  M1 Top w12: P1.2 1359.53,2140.47 U1.55
TCK_SWCLK: P1.3 U1.49 | length 1015
  M1 Top w12: P1.3 1100,2450 1477.64,2072.36 U1.49
TMS_SWDIO: P1.4 U1.46 | length 1174.1
  M1 Top w12: P1.4 1200,2430 1515,2115 1515,1610 1490,1585 1490,1540 1506.73,1523.27 U1.46
UART_Rx: P4.2 U1.42 U4.17 | length 1852.1
  M1 Top w12: U1.42 1690.47,1444.53 v1(1730,1405) ; v1(2145,1370) 2190,1370 2230.47,1410.47 U4.17 ; v1(2710,790) P4.2
  M4 Bottom w12: v1(1730,1405) 1770,1365 1953.38,1365 1958.38,1370 v1(2145,1370) 2147.3,1367.7 2147.3,1352.7 v1(2710,790)
UART_Tx: P4.1 U1.43 U4.18 | length 1983.7
  M1 Top w12: U1.43 1850.79,1464.21 2005,1310 2243.13,1310 2250.16,1317.03 ; U4.18 2250.16,1317.03 ; P4.1 2250.16,1149.84 2250.16,1317.03
UCTS: P5.4 U5.J16 | length 2281.9
  M1 Top w15: P5.4 340,725 370,695 371.21,695 380,686.21 380,440 345,405 v1(220,405) ; v1(1555,105) 1556.72,106.72 1669.82,106.72 U5.J16
  M4 Bottom w15: v1(220,405) 400,225 1365,225 1485,105 v1(1555,105)
URTS: P5.6 U5.J13 | length 1685.6
  M1 Top w15: P5.6 191.72,525 199.87,516.85 v1(202.3,516.85) ; v1(1555,285) 1556.4,286.4 1672.2,286.4 U5.J13 U5.J13@1674.7,288.9
  M4 Bottom w15: v1(202.3,516.85) 464.15,255 1325,255 1355,285 v1(1555,285)
VBUS: C13.2 C14.2 D1.4 J4.1 J5.1 R20.1 U4.7 | length 1684.9
  M1 Top w15: C14.2 2152.5,1702.5 2165.9,1702.5 2233,1769.6 R20.1 ; U4.7 2289.53,1600.59 2298.94,1610 2298.94,1717.66 2247,1769.6 R20.1 ; 2300,1610 2323.05,1610 2334.9,1621.85 2334.9,1625.2 2336.65,1626.95 C13.2 ; D1.4 2695.13,1732.8 ; J4.1 2728.82,1591.18 2695.13,1624.87 2695.13,1732.8 ; J5.1 2695.13,2000 ; R20.1 2240,1920 2320,2000 2695.13,2000 ; 2695.13,1732.8 2695.13,2000
VDD: C15.2 C16.2 R18.2 U4.6 | length 360.3
  M1 Top w15: U4.6 2335,1590 2410.3,1590 2416.95,1596.65 2416.95,1833.05 C16.2
VREF+: C9.2 FB1.1 U1.13 | length 173.4
  M1 Top w12: C9.2 1013.05,1329.67 1016.3,1326.42 U1.13
  M1 Top w15: FB1.1 1000.55,1254.6 1013.05,1267.1 C9.2@1013.05,1325
pads on no net: FD1.0 FD2.0 FD3.0 FD4.0 J1.3 J1.4 J2.3 J2.4 J3.3 J3.4 J4.6 J4.7 J4.8 J4.9 J4.10 J4.11 J5.3 J5.4 U1.2 U1.5 U1.6 U1.16 U1.17 U1.26 U1.27 U1.28 U1.33 U1.34 U1.35 U1.36 U1.37 U1.38 U1.39 U1.40 U1.44 U1.45 U1.51 U1.52 U1.53 U1.54 U1.56 U1.57 U1.60 U1.61 U1.62 U4.1 U4.2 U4.10 U4.13 U4.19 U4.20 U5.J8 U5.J15 X1.2 X1.3

## Polygon pours and split planes (outlines as drawn)
GND on M2 GND (split plane): 2979.9,2541.68 2979.9,58.32 2941.68,20.1 58.32,20.1 20.1,58.32 20.1,2541.68 58.32,2579.9 2941.68,2579.9
3V3 on M3 PWR (split plane): 2979.9,2541.68 2979.9,58.32 2941.68,20.1 58.32,20.1 20.1,58.32 20.1,2541.68 58.32,2579.9 2941.68,2579.9

## Keep-outs
Keep-Out Layer:
  the board outline again, w10

## Other copper
M1 Top:
  text ".layer_name" at 1482,-604.67 h40
M4 Bottom:
  text ".layer_name" at 1432,-598 h40
M2 GND (plane layer: these items are gaps in the copper):
  text ".layer_name" at 1407,-603 h40
M3 PWR (plane layer: these items are gaps in the copper):
  text ".layer_name" at 1407,-618 h40

## Silkscreen, mask and mechanical layers (free items; w line width, h text height)
Drill Drawing:
  circle w3: c4123.5,830.91 r11.11
  lines w3: 4112.39,719.8 4123.5,725.36 4134.61,719.8 4129.06,730.91 4134.61,742.02 4123.5,736.47 4112.39,742.02 4117.95,730.91 4112.39,719.8 ; 4112.39,769.8 4134.61,769.8 4134.61,792.02 4112.39,792.02 4112.39,769.8 ; 4112.39,892.02 4134.61,892.02 4123.5,869.8 4112.39,892.02 ; 4112.39,925.36 4117.95,925.36 4123.5,919.8 4129.06,925.36 4134.61,925.36 4129.06,930.91 4134.61,936.47 4129.06,936.47 4123.5,942.02 4117.95,936.47 4112.39,936.47 4117.95,930.91 4112.39,925.36
  lines w15: 4092.56,704.8 7627.98,704.8 ; 4092.56,954.8 7627.98,954.8 ; 4275.12,654.8 4275.12,1004.8 ; 4454.41,654.8 4454.41,1004.8 ; 4833.63,654.8 4833.63,1004.8 ; 5001.19,654.8 5001.19,1004.8 ; 5244.72,654.8 5244.72,1004.8 ; 5640.21,654.8 5640.21,1004.8 ; 5835.76,654.8 5835.76,1004.8 ; 6083.29,654.8 6083.29,1004.8 ; 6442.52,654.8 6442.52,1004.8 ; 6726.04,654.8 6726.04,1004.8 ; 7169.51,654.8 7169.51,1004.8 ; 4092.56,654.8 7627.98,654.8 7627.98,1004.8 4092.56,1004.8 4092.56,654.8
  text "Symbol" at 4122.56,969.8 h24
  text "Count" at 4290.12,969.8 h24
  text "Hole Size" at 4469.41,969.8 h24
  text "Plated" at 4848.63,969.8 h24
  text "Hole Type" at 5016.19,969.8 h24
  text "Drill Layer Pair" at 5259.72,969.8 h24
  text "Via/Pad" at 5655.21,969.8 h24
  text "Pad Shape" at 5850.76,969.8 h24
  text "Template" at 6098.29,969.8 h24
  text "Description" at 6457.52,969.8 h24
  text "Hole Tolerance (+)" at 6741.04,969.8 h24
  text "Hole Tolerance (-)" at 7184.51,969.8 h24
  text "2" at 4290.12,919.8 h20
  text "38.00mil (0.965mm)" at 4469.41,919.8 h20
  text "PTH" at 4848.63,919.8 h20
  text "Round" at 5016.19,919.8 h20
  text "M1 Top - M4 Bottom" at 5259.72,919.8 h20
  text "Pad" at 5655.21,919.8 h20
  text "Rounded" at 5850.76,919.8 h20
  text "(Mixed)" at 6098.29,919.8 h20
  text "4" at 4290.12,869.8 h20
  text "116.00mil (2.946mm)" at 4469.41,869.8 h20
  text "NPTH" at 4848.63,869.8 h20
  text "Round" at 5016.19,869.8 h20
  text "M1 Top - M4 Bottom" at 5259.72,869.8 h20
  text "Pad" at 5655.21,869.8 h20
  text "Rounded" at 5850.76,869.8 h20
  text "c0hn295" at 6098.29,869.8 h20
  text "16" at 4290.12,819.8 h20
  text "43.00mil (1.092mm)" at 4469.41,819.8 h20
  text "PTH" at 4848.63,819.8 h20
  text "Round" at 5016.19,819.8 h20
  text "M1 Top - M4 Bottom" at 5259.72,819.8 h20
  text "Pad" at 5655.21,819.8 h20
  text "Rounded" at 5850.76,819.8 h20
  text "c160h109z152m80p0" at 6098.29,819.8 h20
  text "27" at 4290.12,769.8 h20
  text "35.43mil (0.900mm)" at 4469.41,769.8 h20
  text "PTH" at 4848.63,769.8 h20
  text "Round" at 5016.19,769.8 h20
  text "M1 Top - M4 Bottom" at 5259.72,769.8 h20
  text "Pad" at 5655.21,769.8 h20
  text "(Mixed)" at 5850.76,769.8 h20
  text "(Mixed)" at 6098.29,769.8 h20
  text "38" at 4290.12,719.8 h20
  text "12.00mil (0.305mm)" at 4469.41,719.8 h20
  text "PTH" at 4848.63,719.8 h20
  text "Round" at 5016.19,719.8 h20
  text "M1 Top - M4 Bottom" at 5259.72,719.8 h20
  text "Via" at 5655.21,719.8 h20
  text "Rounded" at 5850.76,719.8 h20
  text "v61h30" at 6098.29,719.8 h20
  text "87 Total" at 4290.12,669.8 h20
Board Outline:
  lines w10: 0,50 0,2550 50,2600 2950,2600 3000,2550 3000,2525 3000,50 2950,0 50,0 0,50
Fabrication:
  drawing of 324 lines, arcs and shapes, not listed
  text "FABRICATION NOTES" at 5064.33,3693.7 h78.74
  text "1) FABRICATE TO THE 'PCB SPECIFICATION SELECTION' ENTERED ON THE WEBSITE. /  / 2) SUBSTITUTION OF DEFAULT MANUFACTURER STACKUP OF INDICATED LAYER COUNT IS ACCEPTABLE. /  / 3) NO IMPEDANCE CONTROL" at 5049.21,2141.46 h40
  text "Layer" at 4281.34,1983.13 h39.78
  text "Name" at 4559.85,1983.13 h39.78
  text "Material" at 5183.01,1983.13 h39.78
  text "Thickness" at 5759.78,1983.13 h39.78
  text "Constant" at 6197.36,1983.13 h39.78
  text "Board Layer Stack" at 6581.92,1983.13 h39.78
  text "Top Overlay" at 4559.85,1903.57 h39.78
  text "Top Solder" at 4559.85,1824.01 h39.78
  text "Solder Resist" at 5183.01,1824.01 h39.78
  text "0.40mil" at 5759.78,1824.01 h39.78
  text "3.5" at 6197.36,1824.01 h39.78
  text "1" at 4281.34,1744.45 h39.78
  text "M1 Top" at 4559.85,1744.45 h39.78
  text "1.38mil" at 5759.78,1744.45 h39.78
  text "Dielectric 1-2" at 4559.85,1664.89 h39.78
  text "PP-006" at 5183.01,1664.89 h39.78
  text "4.33mil" at 5759.78,1664.89 h39.78
  text "4.29" at 6197.36,1664.89 h39.78
  text "2" at 4281.34,1585.33 h39.78
  text "M2 GND" at 4559.85,1585.33 h39.78
  text "CF-004" at 5183.01,1585.33 h39.78
  text "1.38mil" at 5759.78,1585.33 h39.78
  text "Dielectric 2-3" at 4559.85,1505.77 h39.78
  text "FR-4" at 5183.01,1505.77 h39.78
  text "44.49mil" at 5759.78,1505.77 h39.78
  text "3.96" at 6197.36,1505.77 h39.78
  text "3" at 4281.34,1426.21 h39.78
  text "M3 PWR" at 4559.85,1426.21 h39.78
  text "CF-004" at 5183.01,1426.21 h39.78
  text "1.38mil" at 5759.78,1426.21 h39.78
  text "Dielectric 3-4" at 4559.85,1346.65 h39.78
  text "PP-006" at 5183.01,1346.65 h39.78
  text "4.33mil" at 5759.78,1346.65 h39.78
  text "4.29" at 6197.36,1346.65 h39.78
  text "4" at 4281.34,1267.09 h39.78
  text "M4 Bottom" at 4559.85,1267.09 h39.78
  text "1.38mil" at 5759.78,1267.09 h39.78
  text "Bottom Solder" at 4559.85,1187.53 h39.78
  text "Solder Resist" at 5183.01,1187.53 h39.78
  text "0.40mil" at 5759.78,1187.53 h39.78
  text "3.5" at 6197.36,1187.53 h39.78
  text "Bottom Overlay" at 4559.85,1107.97 h39.78
  text "Total board thickness:" at 4281.34,1028.41 h39.78
  text "59.46mil" at 5759.78,1028.41 h39.78
  text "PROJECT" at 705.48,-218.77 h66.93
  text "'.project_name'" at 1056.86,-234.79 h59.06
  text "ID" at 705.48,-285.7 h66.93
  text "DATE" at 705.48,-351.65 h66.93
  text ".Print_Date .Print_Time" at 1056.86,-351.65 h59.06
  text "VARIANT" at 705.48,-417.59 h66.93
  text "'.VariantName'" at 1056.86,-417.59 h59.06
  text "GVSU" at -455,-480.83 h500
  text "TYPE HERE" at 1056.86,-482.55 h59.06
  text "ENGINEER" at 705.48,-483.54 h66.93
  text ".gvsu_address1" at 706.31,-549.27 h39.37
  text "LAYER" at 1325.56,-549.48 h66.93
  text ".gvsu_address2" at 705.48,-595.33 h39.37
  text "FILE" at -511.06,-616.41 h66.93
  text "'.Pcb_File_Name_No_Path'" at -364.4,-616.41 h59.06
  text "CONFIDENTIAL" at -511.06,-660.7 h39.37
  text "For GVSU educational use.  May be shared by GVSU factulty and staff for educationational purposes." at -17.95,-660.7 h39.37

## Text inside footprints (layer, text, board x,y; h text height)
LED1: Top Overlay "*" at 575.71,885.5 h50 r270; Mechanical 13 "*" at 575.71,799.5 h50 r270
U5: Top Overlay "*" at 2185.4,135.5 h50 r180; Mechanical 13 "*" at 2092.4,135.5 h50 r180
X1: Top Overlay "*" at 958.28,2043 h50 r90; Mechanical 13 "*" at 997.28,2073 h50 r90